# Altium PCB Copy of MIET_464512_002_E3.PcbDoc
Units mm, origin at the board's own origin, x right, y up, seen from the top; angles counter-clockwise.
Board outline 137.75 x 63.75 mm, 2 copper layers (Top Layer, Bottom Layer), stack 1.535 mm thick; 69 components, 92 nets, 344 pads, 8 vias.
Unrouted connection lines stored in the file: 201.
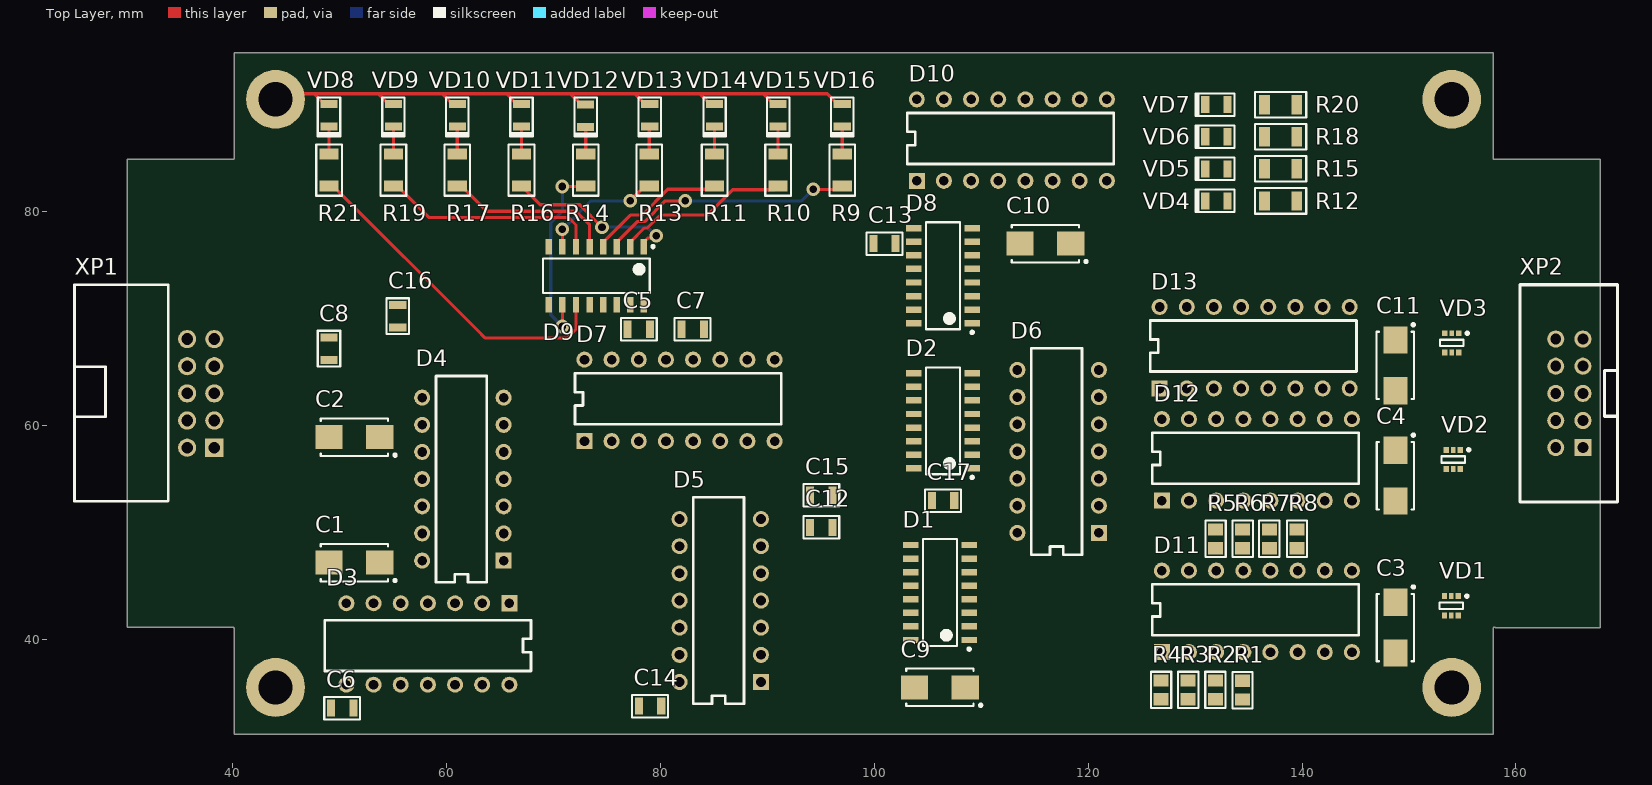
[diagram p0: Top Layer view]
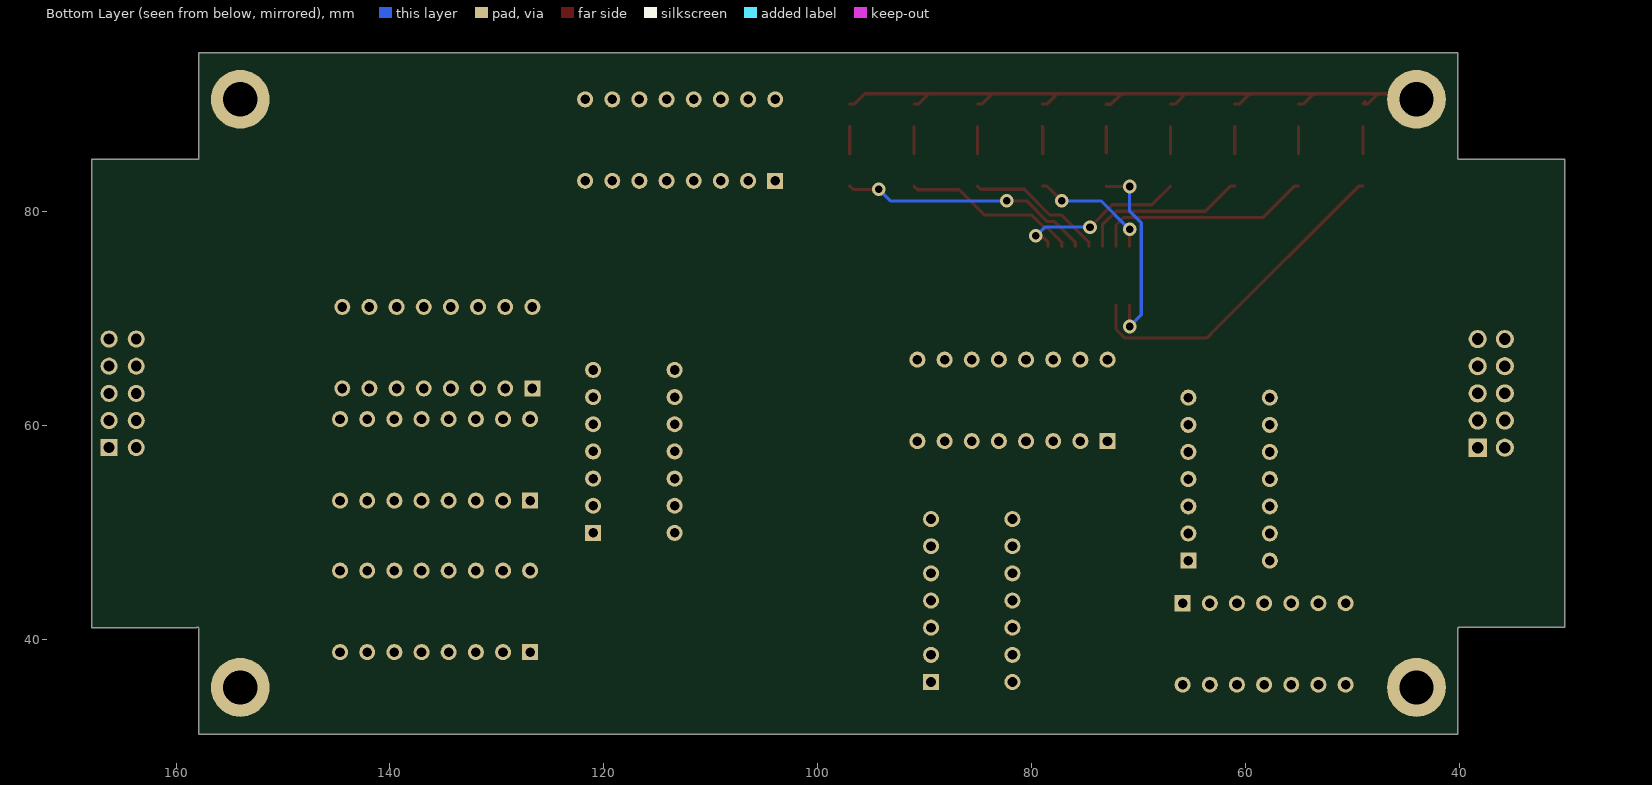
[diagram p1: Bottom Layer view, seen from below]

## Layer stack, top to bottom
Top Solder: solder mask 0.0102, Solder Resist, Dk 3.5
Top Layer: signal copper 0.018
Dielectric 1: core 1.4986, Core-043, Dk 4.3
Bottom Layer: signal copper 0.018
Bottom Solder: solder mask 0.0102, Solder Resist, Dk 3.5

## Board outline
40.127,41 ccw(c40,41) 40,41.127 30.127,41.127 30.127,84.873 40,84.873 ccw(c40,85) 40.127,85 40.127,94.873 157.873,94.873 157.873,85 ccw(c158,85) 158,84.873 167.873,84.873 167.873,41.068 158.107,41.068 ccw(c158,41) 157.873,41 157.873,31.127 40.127,31.127

## Design rules (kind name [scope] priority, off if disabled: settings)
Clearance [All] p1: gap=0.3 ignorepadtopadclearanceinfootprint=FALSE
DiffPairsRouting [All] p1: maxlimit=0.77 minlimit=0.2 mostfreqgap=0.35 toplayer_minwidth=0.2 toplayer_maxwidth=0.5 toplayer_prefwidth=0.38 bottomlayer_minwidth=0.2 bottomlayer_maxwidth=0.5 bottomlayer_prefwidth=0.38 maxuncoupledlength=12.7
HoleSize [All] p1: absolutevalues=TRUE maxlimit=4.5 minlimit=0.3 maxpercent=80.000 minpercent=20.000
HoleToHoleClearance [All] p1: gap=0.8 allowstackedmicrovias=TRUE
PolygonConnect [All] p1: connectstyle=Relief reliefconductorwidth=0.254 reliefentries=4 polygonreliefangle="90 Angle" airgapwidth=0.254
RoomDefinition Room1 [False] p1: confinementstyle=ConfineIn formatcopy=TRUE lockcomponents=FALSE outline 169.635,99.46 213.635,99.46 213.635,86.21 169.635,86.21
RoutingVias Via_for_Room [TouchesRoom('Room1')] p1: holewidth=0.2 width=0.5 viastyle="Through Hole" minholewidth=0.2 minwidth=0.5 maxholewidth=0.2 maxwidth=0.5
RoutingVias [All] p2: holewidth=0.711 width=1.27 viastyle="Through Hole" minholewidth=0.711 minwidth=1.27 maxholewidth=0.711 maxwidth=1.27
SolderMaskExpansion [All] p1: expansion=0.102
Width Width_for_Room [WithinRoom('Room1') or TouchesRoom('Room1')] p1: maxlimit=0.1 minlimit=0.1 preferedwidth=0.1 minimp=50.000000 maximp=50.000000 favimp=50.000000
Width [All] p2: maxlimit=0.3 minlimit=0.3 preferedwidth=0.3 minimp=50.000000 maximp=50.000000 favimp=50.000000
27 further rules are at their usual default settings.

## Classes and differential pairs
component class MIET_464512_002_E3_Sheet_2: C1 C2 C5 C6 C7 C8 D3 D4 D7 D10 XP1
component class MIET_464512_002_E3_Sheet_1: C3 C4 C9 C10 C11 C12 C13 C14 C15 C16 C17 D1 D2 D5 D6 D8 D9 D11 D12 D13 R1 R2 R3 R4 R5 R6 R7 R8 R9 R10 R11 R12 R13 R14 R15 R16 R17 R18 R19 R20 R21 VD1 VD2 VD3 VD4 VD5 VD6 VD7 VD8 VD9 VD11 VD13 VD14 VD15 VD16 XP2
differential pair Out3: +Out3_P -Out3_N
differential pair Out2: +Out2_P -Out2_N
differential pair Out1: +Out1_P -Out1_N

## Components (designator, comment, footprint, x,y, rotation, side; value= is the part's Value field where it differs from the comment)
C1 "C" C-Tantal 51.373,47.166 r180 top
C2 "C" C-Tantal 51.373,58.9 r180 top
C3 "C" C-Tantal 148.737,41.093 r270 top
C4 "C" C-Tantal 148.737,55.297 r270 top
C5 "=Size" 0805_N 77.97,69 r0 top
C6 "=Size" 0805_N 50.233,33.555 r0 top
C7 "=Size" 0805_N 83,69 r0 top
C8 "=Size" 0805_N 49,67.18 r270 top
C9 "C" C-Tantal 106.138,35.5 r180 top
C10 "C" C-Tantal 116,77 r180 top
C11 "C" C-Tantal 148.725,65.618 r270 top
C12 "=Size" 0805_N 95.038,50.468 r0 top
C13 "=Size" 0805_N 100.95,77 r0 top
C14 "=Size" 0805_N 79.02,33.75 r0 top
C15 "=Size" 0805_N 95.038,53.468 r0 top
C16 "=Size" 0805_N 55.423,70.225 r90 top
C17 "=Size" 0805_N 106.425,52.967 r0 top
D1 "SOIC-16" SO16-N 106.138,44.374 r180 top
D2 "SOIC-16" SO16-N 106.425,60.435 r180 top
D3 "74AC00PC" DIP14 65.863,43.37 r270 top
D4 "74AC00PC" DIP14 65.332,47.356 r180 top
D5 "74AC00PC" DIP14 89.4,36.004 r180 top
D6 "74AC00PC" DIP14 121,49.949 r180 top
D7 "MC14520BCP" DIP16 72.89,58.53 r90 top
D8 "SOIC-16" SO16-N 106.425,74 r180 top
D9 "SOIC-16" SO16-N 74,74 r270 top
D10 "MC14520BCP" DIP16 103.97,82.88 r90 top
D11 "DIP-16" DIP16 126.89,38.796 r90 top
D12 "DIP-16" DIP16 126.89,52.967 r90 top
D13 "DIP-16" DIP16 126.682,63.458 r90 top
R1 "0805" RES_0805_2012_N 134.434,35.24 r90 top
R2 "0805" RES_0805_2012_N 131.894,35.262 r90 top
R3 "0805" RES_0805_2012_N 129.354,35.262 r90 top
R4 "0805" RES_0805_2012_N 126.814,35.262 r90 top
R5 "0805" RES_0805_2012_N 131.913,49.399 r270 top
R6 "0805" RES_0805_2012_N 134.453,49.399 r270 top
R7 "0805" RES_0805_2012_N 136.943,49.399 r270 top
R8 "0805" RES_0805_2012_N 139.533,49.399 r270 top
R9 "P1-12-0,25-5%" RES_1206 97,83.888 r90 top
R10 "P1-12-0,25-5%" RES_1206 91,83.888 r90 top
R11 "P1-12-0,25-5%" RES_1206 85.06,83.888 r90 top
R12 "P1-12-0,25-5%" RES_1206 138,81 r0 top
R13 "P1-12-0,25-5%" RES_1206 78.95,83.888 r90 top
R14 "P1-12-0,25-5%" RES_1206 73,83.888 r90 top
R15 "P1-12-0,25-5%" RES_1206 138,84 r0 top
R16 "P1-12-0,25-5%" RES_1206 67,83.888 r90 top
R17 "P1-12-0,25-5%" RES_1206 61,83.888 r90 top
R18 "P1-12-0,25-5%" RES_1206 138,87 r0 top
R19 "P1-12-0,25-5%" RES_1206 55.023,83.888 r90 top
R20 "P1-12-0,25-5%" RES_1206 138,90 r0 top
R21 "P1-12-0,25-5%" RES_1206 49,83.888 r90 top
VD1 "SOT-363" SOT363_NXP 153.97,43.133 r270 top
VD2 "SOT-363" SOT363_NXP 154.145,56.815 r270 top
VD3 "SOT-363" SOT363_NXP 154,67.716 r270 top
VD4 "0805" 0805_LightDiode 132,81 r0 top
VD5 "0805" 0805_LightDiode 132,84 r0 top
VD6 "0805" 0805_LightDiode 132,87 r0 top
VD7 "0805" 0805_LightDiode 132,90 r0 top
VD8 "0805" 0805_LightDiode 49,89 r90 top
VD9 "0805" 0805_LightDiode 55.023,89 r90 top
VD10 "0805" 0805_LightDiode 61,89 r90 top
VD11 "0805" 0805_LightDiode 67,89 r90 top
VD12 "0805" 0805_LightDiode 73,88.984 r90 top
VD13 "0805" 0805_LightDiode 79,89 r90 top
VD14 "0805" 0805_LightDiode 85.06,89 r90 top
VD15 "0805" 0805_LightDiode 91,89 r90 top
VD16 "0805" 0805_LightDiode 97,89 r90 top
XP1 "TE_1-1634689-0" BH-10R 37,63 r0 top
XP2 "TE_1-1634688-0 \"TE Connectivity\"" TE_1-1634688-0_IDC10_V 165,63 r90 top

## Footprints (in the part's own frame and the unit in brackets; to place one, negate y for a bottom-side part, rotate by r counter-clockwise, add the part's x,y. Pads: shape width x height; smd on the part's side, far side on the other; paste and mask are expansions set on the pad)
0805_LightDiode [mm] "Светодиод 0805 прямой высота 1,2 мм"
  rect 0.75x1.6 smd: A(-1.05,0) K(1.05,0)
  silkscreen extent -1.97,-1.05 1.68,1.05, body extent -1.03,-0.6 1.03,0.65, height 0.9
0805_N [mm] "Резистор, конденсатор"
  rect 0.75x1.6 smd: 1(-1.05,0) 2(1.05,0)
  silkscreen extent -1.68,-1.05 1.68,1.05, body extent -1.05,-0.58 1.05,0.58, height 1
BH-10R [mm] "Разъем угловой 2х5х2,54 типа ВН"
  rect 1.7x1.7 hole 1.1: 1(1.27,-5.08)
  round 1.7 hole 1.1: 2(-1.27,-5.08) 3(1.27,-2.54) 4(-1.27,-2.54) 5(1.27,0) 6(-1.27,0) 7(1.27,2.54) 8(-1.27,2.54) 9(1.27,5.08) 10(-1.27,5.08)
  silkscreen extent -11.8,-10.1 -3.05,10.15, body extent -11.85,-10.2 1.65,10.15, height 9.13
C-Tantal [mm]
  rect 2.55x2.25 smd: +(-2.375,0) -(2.375,0)
  silkscreen extent -3.93,-1.75 3.15,1.8, body extent -3.37,-1.75 3.37,1.75, height 2.81
DIP14 [mm]
  rect 1.5x1.5 hole 0.9: 1(0,0)
  round 1.5 hole 0.9: 2(0,-2.54) 3(0,-5.08) 4(0,-7.62) 5(0,-10.16) 6(0,-12.7) 7(0,-15.24) 8(7.62,-15.24) 9(7.62,-12.7) 10(7.62,-10.16) 11(7.62,-7.62) 12(7.62,-5.08) 13(7.62,-2.54) 14(7.62,0)
  silkscreen extent 1.58,-17.27 6.33,2.03, body extent -0.25,-17.27 7.95,2.03, height 5.08
DIP16 [mm]
  rect 1.5x1.5 hole 0.9: 1(0,0)
  round 1.5 hole 0.9: 2(0,-2.54) 3(0,-5.08) 4(0,-7.62) 5(0,-10.16) 6(0,-12.7) 7(0,-15.24) 8(0,-17.78) 9(7.62,-17.78) 10(7.62,-15.24) 11(7.62,-12.7) 12(7.62,-10.16) 13(7.62,-7.62) 14(7.62,-5.08) 15(7.62,-2.54) 16(7.62,0)
  silkscreen extent 1.58,-18.41 6.35,0.89, body extent -0.25,-18.54 7.95,0.76, height 5.08
RES_0805_2012_N [mm] "Rezistor 0805"
  rect 1.15x1.4 smd: 1(-0.875,0) 2(0.875,0)
  silkscreen extent -1.7,-0.95 1.7,0.95, body extent -1.1,-0.7 1.1,0.7, height 0.6
RES_1206 [mm]
  rect 1x1.8 smd: 0(-1.5,0) 1(1.5,0)
  silkscreen extent -2.4,-1.2 2.4,1.2, body extent -2.4,-0.8 1.6,1.2, height 0.6
SO16-N [mm] "SOIC, 16-Leads, Body 9,90x3,90mm, Pitch 1,27mm, IPC Medium Density"
  rect 1.45x0.6 smd: 1(-2.725,4.445) 2(-2.725,3.175) 3(-2.725,1.905) 4(-2.725,0.635) 5(-2.725,-0.635) 6(-2.725,-1.905) 7(-2.725,-3.175) 8(-2.725,-4.445) 9(2.725,-4.445) 10(2.725,-3.175) 11(2.725,-1.905) 12(2.725,-0.635) 13(2.725,0.635) 14(2.725,1.905) 15(2.725,3.175) 16(2.725,4.445)
  silkscreen extent -2.85,-5 1.6,5.42, body extent -3,-5 3,5, height 1.45
SOT363_NXP [mm]
  rect 0.55x0.5 smd: 1(-0.9,0.65) 3(-0.9,-0.65) 4(0.9,-0.65) 6(0.9,0.65)
  rect 0.55x0.4 smd: 2(-0.9,0) 5(0.9,0)
  silkscreen extent -1.02,-1.1 0.3,1.58, body extent -1.15,-1.1 1.15,1.1, height 1.1
TE_1-1634688-0_IDC10_V [mm]
  rect 1.6x1.6 hole 1.02: 1(-5.08,-1.27)
  round 1.6 hole 1.02: 2(-5.08,1.27) 3(-2.54,-1.27) 4(-2.54,1.27) 5(0,-1.27) 6(0,1.27) 7(2.54,-1.27) 8(2.54,1.27) 9(5.08,-1.27) 10(5.08,1.27)
  silkscreen extent -10.16,-4.5 10.16,4.6, body extent -10.16,-4.32 10.16,4.9, height 6.41

## Part data
C1 C2 C3 C4 C9 C10 C11: library part K53-65_C_10%, "К53-65 Конденсатор танталовый C(6032) 0,47-100 мкФ", Manufacturer="ОАО \"Элеконд\"", Tolerance=10%, BOM="Конденсатор К53-65 \"C\" - *B - *мкФ ±10% АЖЯР.673546.004 ТУ", Created_by=Желобаев, Issue_date=6.01.2019, Name="Конденсатор К53-65", Size=C, TU="АЖЯР.673546.004 ТУ", Version=0, Weight=0,3
C5 C6 C7 C8 C12 C13 C14 C15 C16 C17: library part К10-79_0805_Н90, "Чип конденсатор 0805 Н90 ряд Е6", Case=0805, Manufacturer="ООО \"Кулон\"", Tolerance=+80%-20%, BOM="Конденсатор К10-79-*-B-*+80%-20%-Н90 АЖЯР.673511.004 ТУ", Created_by=Желобаев, Issue_date=19_12_2018, Name="Конденсатор К10-79", TKE=Н90, TU="АЖЯР.673511.004 ТУ", Type=K10-79, Version=0, Weight=0.05
D1 D2 D8 D9: library part HCF4017BM1, "Декадный счетчик c 10 декодированными выходами", Manufacturer=STMicroelectronics, Power_Voltage="-0.5 -22 V", BOM="Микросхема HCF4017BM1 \"STMicroelectronics\"", Case=SOIC-16, Created_by=Желобаев, Issue_date=05.04.2019, Name="Микросхема HCF4017BM1", Version=0
D3 D4 D5 D6: "4 элемента 2И-НЕ TTL PDIP-14", Case=DIP-14, Manufacturer="ON Semiconductor", Power_Voltage="4.5 - 5.5 V", BOM="Микросхема 74AC00PC \"ON Semiconductor\"", Created_by=Желобаев, Issue_date=10.04.2019, Name="Микросхема 74AC00PC", Version=0
D7 D10: "Два двоичных счетчика", Case=DIP-16, Manufacturer=Motorola, BOM="Микросхема MC14520BCP \"Motorola\"", Created_by=Желобаев, Issue_date=6.01.2019, Name="Микросхема MC14520BCP", Version=0
D11 D12 D13: library part 74HC151N, "мультиплексор 8 канальный CMOS", Manufacturer="NXP Semiconductors", Power_Voltage="2.0 -6.0 V", BOM="Микросхема 74HC151N \"NXP Semiconductors\"", Case=DIP-16, Created_by=Желобаев, Issue_date=05.04.2019, Name="Микросхема 74HC151N", Version=0
R1 R2 R3 R4 R5 R6 R7 R8: library part Р1-12-0,125-5%, "Резистор от 0,75 Ом до 2 МОм", Manufacturer="ОАО \"НПО \"Эркон\"", Tolerance=5%, Voltage=150, BOM="Резистор Р1-12-0,125 * 5%-M-\"A\" АЛЯР.434110.005 ТУ", ComponentLink1Description="Сайт производителя", ComponentLink1URL=https://www.erkon-nn.ru/catalog/rezistory-obshchego-primeneniya/, Created_by=Желобаев, Hight=0,5, Issue_date=05_12_2018, LiveStatus=Производится, Name="Резистор Р1-12-0,125", Reliability=0,000001, Size=0805, TKR=M, TU="АЛЯР.434110.005 ТУ", Type="Р1-12-0,125±5%-М-\"А\"", Version=00, Weight=0,01
R9 R10 R11 R12 R13 R14 R15 R16 R17 R18 R19 R20 R21: "Резистор 270 Ом M-\"A\" АЛЯР.434110.005 ТУ", Manufacturer="ОАО \"КБ \"ИКАР\"\"", Tolerance=5%, Created_by=Сарынина, Hight=0,5, Issue_date=23_09_2020, Live_status="Дед внутри", Name="Резистор Р1-12-0,25", Reliability=0.000001, Size=0805, TKR=M, TU="АЛЯР.434110.005 ТУ", Type="Р1-12-0,25±5%-М-\"А\"", Version=00
VD1 VD2 VD3: library part BAV99S, "Высокоскоростные, переключающие диоды", Manufacturer=Nexperia, Voltage=100, BOM="Диод BAV99S \"Nexperia\"", Case=SOT-363, Created_by=Желобаев, Issue_date=07.01.2019, Name="Диод BAV99S", Version=0
VD4 VD5 VD6 VD7 VD9 VD10 VD11 VD12 VD13 VD14 VD15 VD16: library part AP2012MGC, "светодиод 0805 зеленый", Manufacturer=Kingbright, BOM="Диод AP2012MGC  \"Kingbright\"", Case=0805, Created_by=Желобаев, Issue_date=13.05.2019, Name="Диод AP2012MGC", Version=0
VD8: library part AP2012EC, "светодиод 0805 красный", Manufacturer=Kingbright, BOM="Диод AP2012EC  \"Kingbright\"", Case=0805, Created_by=Желобаев, Issue_date=13.05.2019, Name="Диод AP2012EC", Version=0
XP1: "Вилка типа BH-10R угловая правая двухрядная 2х5х2.54", Case=BH-10R, Manufacturer="TE Connectivity", BOM="Вилка угловая TE_1-1634689-0 \"TE Connectivity\"", Created_by=Желобаев, Issue_date=13.05.2019, Name="Вилка угловая TE_1-1634689-0", Version=0
XP2: "Вилка прямая"

## Free pads (board coordinates)
  round 5.5 hole 3.2: M1(44,90.5) M2(44,35.5) M3(154,90.5) M4(154,35.5)

## Via types
v1: diameter 1.27, hole 0.711, Top Layer to Bottom Layer, 8 vias

## Nets (pads, with @x,y where several pads share a name; then routed paths per layer and width w, separated by ;. In a path a pad name is that pad's centre, name@x,y a point inside that pad or via, vN(x,y) a via of type N, cw(c..) or ccw(c..) an arc to the next point about the centre after c; other vN are vias at no path point)
+5V: C3.+ C4.+ C5.2 C6.1 C7.2 C8.1 C9.+ C10.+ C11.+ C12.2 C13.1 C14.2 C15.2 C16.1 C17.2 D1.16 D2.16 D3.14 D4.14 D5.14 D6.14 D7.2 D7.10 D7.16 D8.16 D9.16 D10.2 D10.10 D10.16 D11.16 D12.16 D13.16 VD1.2 VD1.5 VD2.2 VD2.5 VD3.2 VD3.5 XP1.9
Canal16_0: D2.3 D12.4
Canal16_1: D2.2 D12.3
Canal16_2: D2.4 D12.2
Canal16_3: D2.7 D12.1
Canal16_4: D2.10 D12.15
Canal16_5: D2.1 D12.14
Canal16_6: D2.5 D12.13
Canal16_7: D2.6 D12.12
Canal16_8: D8.3 D13.4
Canal16_9: D8.2 D13.3
Canal16_10: D8.4 D13.2
Canal16_11: D8.7 D13.1
Canal16_12: D8.10 D13.15
Canal16_13: D8.1 D13.14
Canal16_14: D8.5 D13.13
Canal16_15: D8.6 D13.12
Canal16_17: D2.9 VD4.A
Canal16_18: D2.11 VD5.A
Canal16_19: D8.9 VD6.A
Canal16_20: D8.11 VD7.A
Canal_A_0: D11.4 R1.2
Canal_A_1: D11.3 R2.2
Canal_A_2: D11.2 R3.2
Canal_A_3: D11.1 R4.2
Canal_A_4: D11.15 R5.2
Canal_A_5: D11.14 R6.2
Canal_A_6: D11.13 R7.2
Canal_A_7: D11.12 R8.2
Clock: D1.14 D3.1 D3.8
GND: C1.- C2.- C3.- C4.- C5.1 C6.2 C7.1 C8.2 C9.- C10.- C11.- C12.1 C13.2 C14.1 C15.1 C16.2 C17.1 D1.8 D1.13 D2.8 D2.13 D3.7 D4.7 D5.7 D6.7 D7.8 D8.8 D8.13 D9.8 D9.13 D10.8 D11.8 D12.8 D13.8 pad.M1 pad.M2 pad.M3 pad.M4 R12.1 R15.1 R18.1 R20.1 VD1.1 VD1.4 VD2.1 VD2.4 VD3.1 VD3.4 VD8.K VD9.K VD10.K VD11.K VD12.K VD13.K VD14.K VD15.K VD16.K XP1.10 XP2.3 XP2.4 XP2.7 XP2.8 | length 68.8
  Top Layer w0.3: pad.M1@44.225,90.275 pad.M1 44.53,91.03 47.595,91.03 ; VD8.K@48.775,90.275 VD8.K 48.575,90.05 47.595,91.03 ; VD9.K 54.598,90.05 53.617,91.03 ; VD10.K 60.575,90.05 59.595,91.03 ; VD11.K 66.575,90.05 65.595,91.03 ; VD12.K 72.575,90.034 71.579,91.03 ; VD13.K 78.575,90.05 77.595,91.03 ; VD14.K 84.635,90.05 83.654,91.03 ; VD15.K 90.575,90.05 89.595,91.03 ; VD16.K 96.575,90.05 95.595,91.03 89.595,91.03 ; 47.595,91.03 53.617,91.03 ; 53.617,91.03 59.595,91.03 ; 59.595,91.03 65.595,91.03 ; 65.595,91.03 71.579,91.03 ; 71.579,91.03 77.595,91.03 ; 77.595,91.03 83.654,91.03 ; 83.654,91.03 89.595,91.03
NetC1_+: C1.+ D3.6 D3.9 D3.10
NetC2_+: C2.+ D4.6 D4.9 D4.10
NetD1_1: D1.1 R6.1
NetD1_2: D1.2 R2.1
NetD1_3: D1.3 R1.1
NetD1_4: D1.4 R3.1
NetD1_5: D1.5 R7.1
NetD1_6: D1.6 R8.1
NetD1_7: D1.7 R4.1
NetD1_10: D1.10 R5.1
NetD1_12: D1.12 D5.1 D5.2
NetD2_12: D2.12 D5.9 D5.10
NetD2_14: D2.14 D5.6
NetD3_2: D3.2 D4.2 XP1.1
NetD3_3: D3.3 D3.4 D3.5
NetD3_11: D3.11 D8.14
NetD3_12: D3.12 D3.13 D5.3 D5.4 D5.5 D6.1
NetD4_1: D4.1 D4.8 D7.1
NetD4_3: D4.3 D4.4 D4.5
NetD5_8: D5.8 D6.4
NetD5_11: D5.11 D6.10 D6.12 D6.13
NetD5_12: D5.12 D5.13 D8.12
NetD6_2: D6.2 D6.5 D6.9
NetD6_3: D6.3 D11.7
NetD6_6: D6.6 D12.7
NetD6_8: D6.8 D13.7
NetD6_11: D6.11 D9.14
NetD7_6: D7.6 D7.9
NetD9_1: D9.1 R16.0 | length 16.4
  Top Layer w0.3: R16.0 68.749,80.638 72.444,80.638 v1(74.529,78.554) ; D9.1 78.445,77.15 78.838,77.543 79.418,77.543 v1(79.604,77.729)
  Bottom Layer w0.3: v1(74.529,78.554) 78.779,78.554 v1(79.604,77.729)
NetD9_2: D9.2 R10.0 | length 16.4
  Top Layer w0.3: D9.2 77.175,77.15 78.494,78.469 78.764,78.469 79.964,79.669 81.817,79.669 84.377,79.669 86.746,82.037 90.65,82.037 R10.0
NetD9_3: D9.3 R9.0 | length 23.7
  Top Layer w0.3: D9.3 75.905,77.15 77.824,79.069 78.516,79.069 80.447,81 v1(82.3,81) ; v1(94.275,82.075) 96.688,82.075 R9.0
  Bottom Layer w0.3: v1(82.3,81) 93.2,81 v1(94.275,82.075)
NetD9_4: D9.4 R11.0 | length 13
  Top Layer w0.3: D9.4 74.635,77.15 74.954,77.469 74.987,77.469 77.187,79.669 78.267,79.669 80.684,82.085 84.757,82.085 R11.0
NetD9_5: D9.5 R17.0 | length 15.9
  Top Layer w0.3: R17.0 61.4,82.388 63.749,80.038 72.087,80.038 73.365,78.76 D9.5
NetD9_6: D9.6 R19.0 | length 20.6
  Top Layer w0.3: R19.0 55.423,82.388 58.372,79.438 71.402,79.438 72.095,78.745 D9.6
NetD9_7: D9.7 R13.0 | length 11.4
  Top Layer w0.3: D9.7 70.825,77.116 v1(70.825,78.353) ; v1(77.154,81) 77.921,81.767 77.929,81.767 78.55,82.388 R13.0
  Bottom Layer w0.3: v1(70.825,78.353) 70.853,78.353 73.5,81 v1(77.154,81)
NetD9_10: D9.10 R14.0 | length 18.2
  Top Layer w0.3: v1(70.825,69.255) D9.10 ; v1(70.825,82.35) 72.962,82.35 R14.0
  Bottom Layer w0.3: v1(70.825,69.255) 69.74,70.34 69.74,78.944 70.825,80.029 v1(70.825,82.35)
NetD9_11: D9.11 R21.0 | length 31.6
  Top Layer w0.3: R21.0 49.4,82.388 62.788,69 62.792,69 63.622,68.17 71.274,68.17 72.095,68.991 D9.11
NetD10_6: D10.6 D10.9
NetR9_1: R9.1 VD16.A | length 2.6
  Top Layer w0.3: R9.1 VD16.A
NetR10_1: R10.1 VD15.A | length 2.6
  Top Layer w0.3: R10.1 VD15.A
NetR11_1: R11.1 VD14.A | length 2.6
  Top Layer w0.3: R11.1 VD14.A
NetR12_0: R12.0 VD4.K
NetR13_1: R13.1 VD13.A | length 2.6
  Top Layer w0.3: R13.1 78.95,87.9 VD13.A
NetR14_1: R14.1 VD12.A | length 2.5
  Top Layer w0.3: R14.1@73,85.488 VD12.A VD12.A@73,87.957
NetR15_0: R15.0 VD5.K
NetR16_1: R16.1 VD11.A | length 2.6
  Top Layer w0.3: R16.1 VD11.A
NetR17_1: R17.1 VD10.A | length 2.6
  Top Layer w0.3: R17.1 VD10.A
NetR18_0: R18.0 VD6.K
NetR19_1: R19.1 VD9.A | length 2.6
  Top Layer w0.3: R19.1 VD9.A
NetR20_0: R20.0 VD7.K
NetR21_1: R21.1 VD8.A | length 2.6
  Top Layer w0.3: R21.1 VD8.A
Out1_N: D11.6 VD1.3 XP2.2
Out1_P: D11.5 VD1.6 XP2.1
Out2_N: D12.6 VD2.3 XP2.6
Out2_P: D12.5 VD2.6 XP2.5
Out3_N: D13.6 VD3.3 XP2.10
Out3_P: D13.5 VD3.6 XP2.9
Reset: D1.15 D2.15 D7.7 D7.15 D8.15 D9.15 D10.7 D10.15 XP1.2
S0: D7.11 D11.11 D12.11 D13.11
S1: D7.14 D10.1 D11.10 D12.10 D13.10
S2: D10.14 D11.9 D12.9 D13.9
pads on no net: D1.9 D1.11 D4.11 D4.12 D4.13 D7.3 D7.4 D7.5 D7.12 D7.13 D9.9 D9.12 D10.3 D10.4 D10.5 D10.11 D10.12 D10.13 XP1.3 XP1.4 XP1.5 XP1.6 XP1.7 XP1.8

## Silkscreen, mask and mechanical layers (free items; w line width, h text height)
Top Mechanical 1/Mechanical 2:
  lines w0.3: 30,41 40,41 40,31 158,31 158,41 ; 30,41.057 30,85 40,85 40,95 158,95 158,90 158,85 168,85 168,40.941 ; 158,40.941 167.941,40.941